# Altium PCB Arduino-SMPS-LED-Shield-Board.PcbDoc
Units mil, origin at the board's own origin, x right, y up, seen from the top; angles counter-clockwise.
Board outline 2700 x 2100 mil, 2 copper layers (Top Layer, Bottom Layer), stack 62.8 mil thick; 15 components, 31 nets, 62 pads, 20 vias.
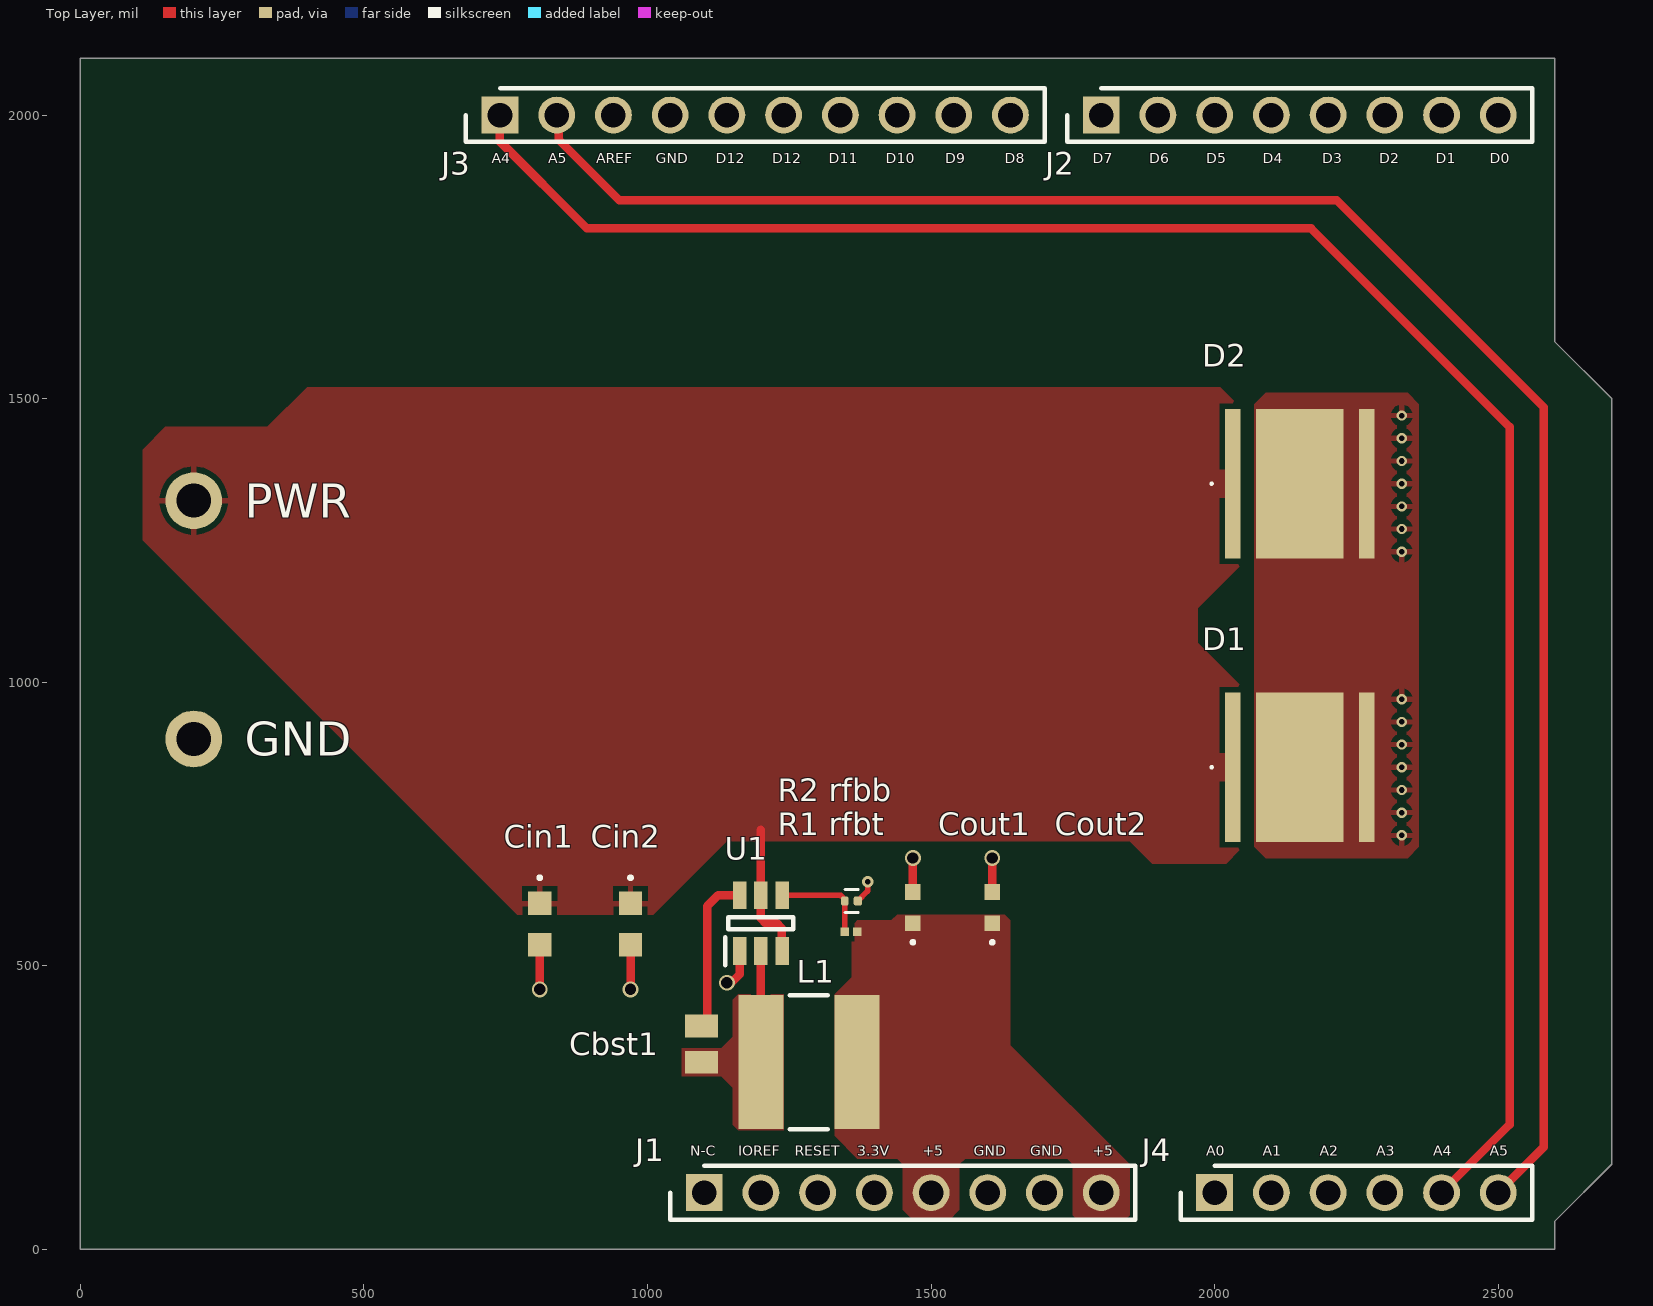
[diagram p0: Top Layer view]
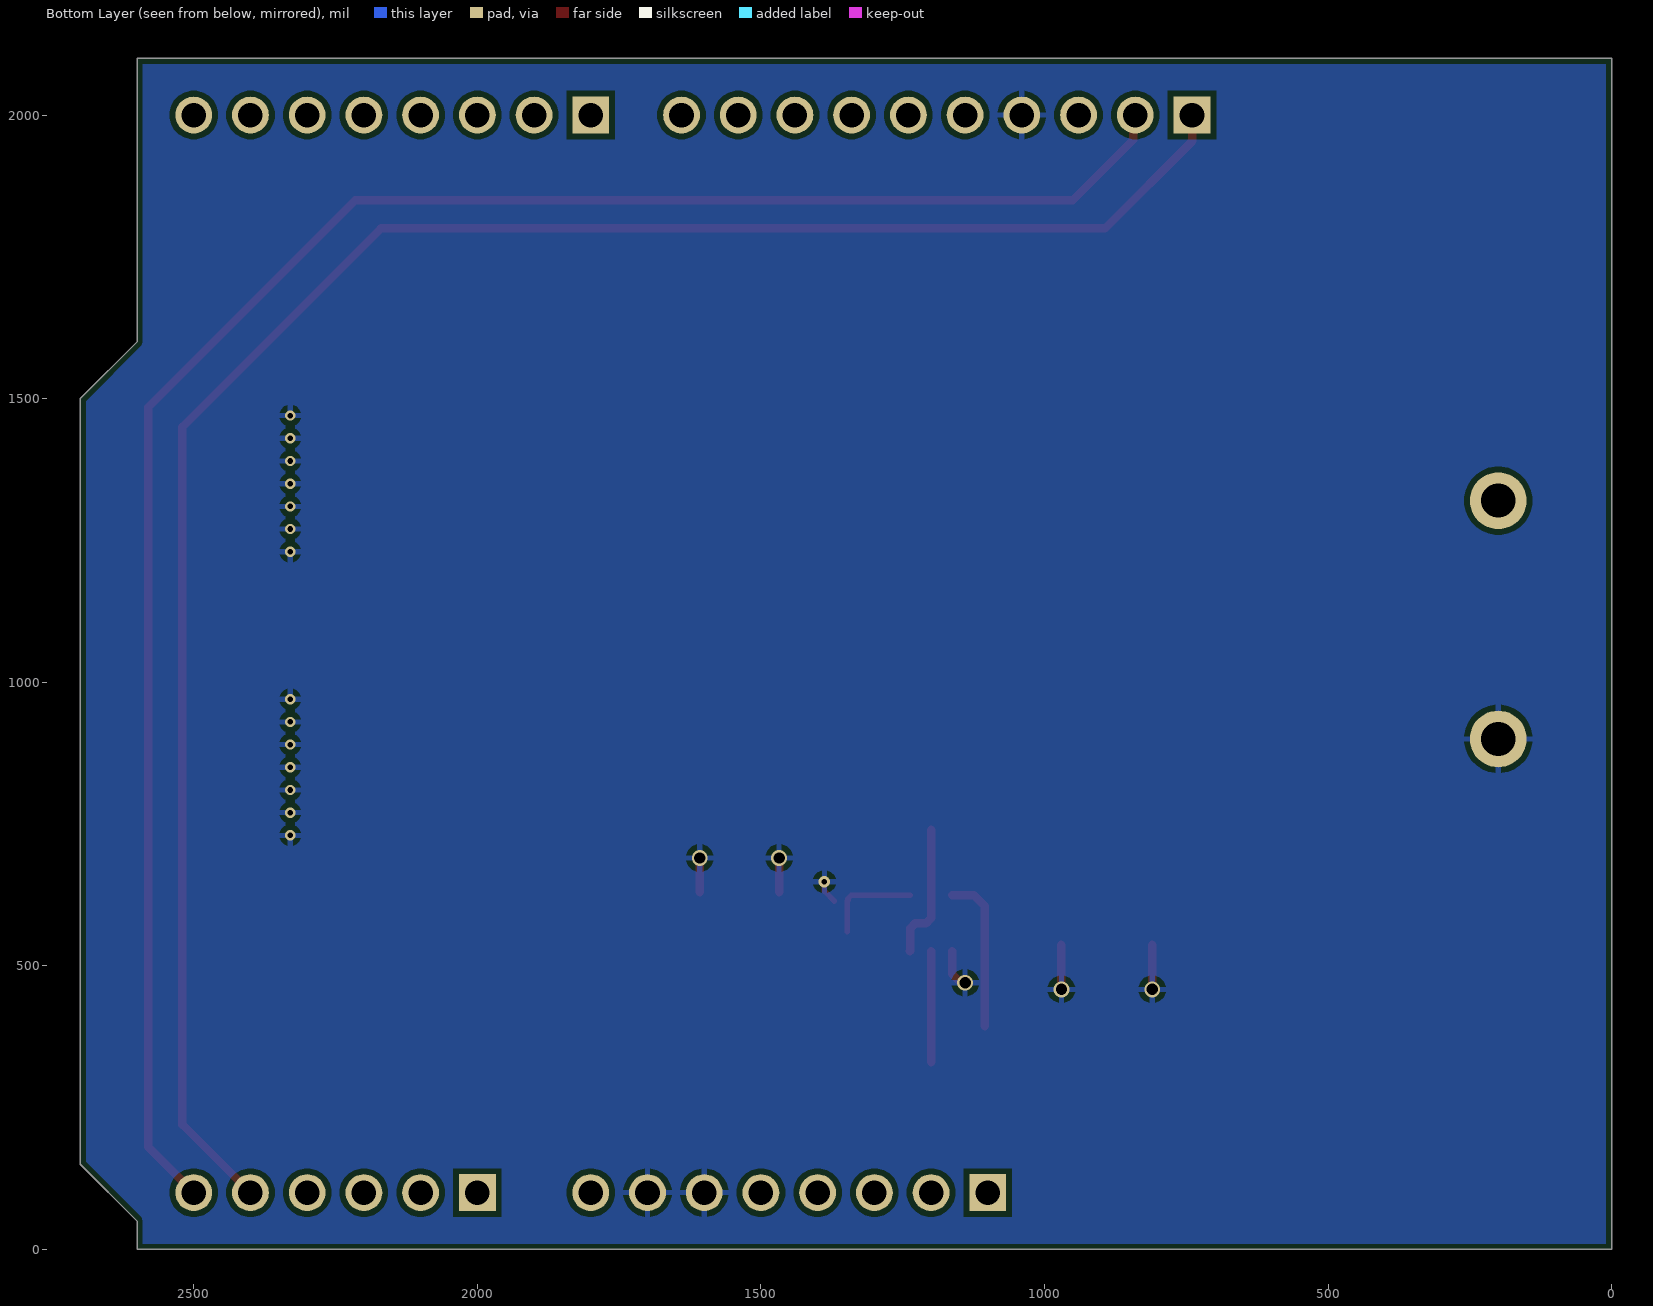
[diagram p1: Bottom Layer view, seen from below]
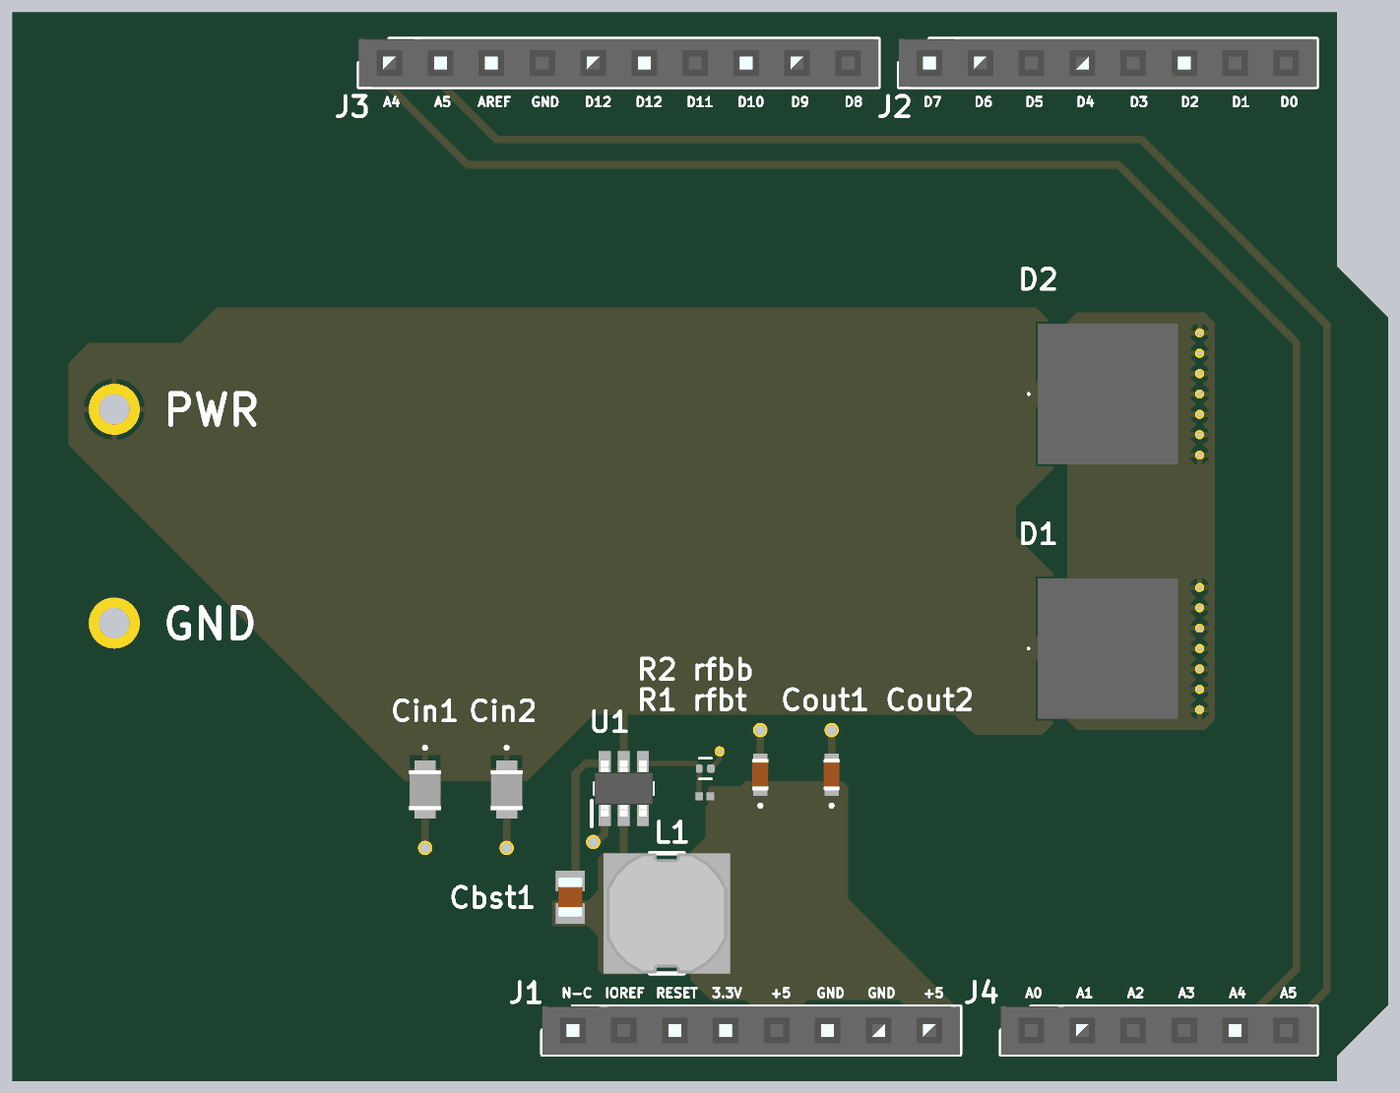
[diagram p2: 3D render of the assembled board from above, using the file's embedded part models]

## Layer stack, top to bottom
Top Solder: solder mask 0.4, Solder Resist, Dk 3.5
Top Layer: signal copper 1.4
Dielectric 1: dielectric 60, FR-4, Dk 4.8
Bottom Layer: signal copper 1.4
Bottom Solder: solder mask 0.4, Solder Resist, Dk 3.5

## Board outline
0,0 0,2100 2600,2100 2600,1600 2700,1500 2700,150 2600,50 2600,0

## Design rules (kind name [scope] priority, off if disabled: settings)
BoardOutlineClearance [All] p1: gap=10 ignorepadtopadclearanceinfootprint=FALSE
Clearance [All] p1: gap=10 ignorepadtopadclearanceinfootprint=TRUE except(8: Arc-SMDPad Track-SMDPad)
MinimumSolderMaskSliver [All] p1: minsoldermaskwidth=5
PolygonConnect [All] p1: connectstyle=Relief reliefconductorwidth=10 reliefentries=4 polygonreliefangle="90 Angle" airgapwidth=10
RoutingVias [All] p1: holewidth=10 width=18 viastyle="Through Hole" minholewidth=6 minwidth=14 maxholewidth=28 maxwidth=50
SilkToSolderMaskClearance [IsPad] p1: minsilkscreentomaskgap=5 clearancetoexposedcopper=TRUE
SolderMaskExpansion [All] p1: expansion=0 istentingtop=FALSE
Width [All] p1: maxlimit=30 minlimit=5 preferedwidth=15
28 further rules are at their usual default settings.

## Components (designator, comment, footprint, x,y, rotation, side; value= is the part's Value field where it differs from the comment)
Cbst1 "100nF" CAPC2012X94N 1095,361.89 r270 top
Cin1 "10 µF" C2012_Commercial 810,573.58 r270 top
Cin2 "10 µF" C2012_Commercial 970,573.58 r270 top
Cout1 "4.7 µH" C1608_Commercial 1467.87,602.44 r90 top
Cout2 "4.7 µH" C1608_Commercial 1607.87,602.44 r90 top
D1 "12V 1A LED" MKRAWT0200000D00J2051 2150,850 r0 top
D2 "12V 1A LED" MKRAWT0200000D00J2051 2150,1350 r0 top
J1 "SSQ-108-03-T-S" RHDR8W64P254_1X8_2083X241X851P 1100,100 r180 top
J2 "SSQ-108-03-T-S" RHDR8W64P254_1X8_2083X241X851P 1800,2000 r180 top
J3 "SSQ-110-03-T-S" RHDR10W64P254_1X10_2591X241X851P 740,2000 r180 top
J4 "SSQ-106-03-T-S" RHDR6W64P254_1X6_1575X241X851P 2000,100 r180 top
L1 "4.7 µH" SRN6045_1 1284.51,330 r0 top
"R1 rfbt" "RC0201FR-0756K2L" RESC0603X26N#1 1358.94,560 r0 top value="56.2 kΩ"
"R2 rfbb" "C0201FR-0710KL" RESC0603X26N#2 1359.88,614.33 r0 top value="10 kΩ"
U1 "TPS562200DDCR" SOT95P280X110-6N 1199.86,575.12 r90 top

## Footprints (in the part's own frame and the unit in brackets; to place one, negate y for a bottom-side part, rotate by r counter-clockwise, add the part's x,y. Pads: shape width x height; smd on the part's side, far side on the other; paste and mask are expansions set on the pad)
C1608_Commercial [mm]
  rect 0.7x0.7 smd: 1(-0.7,0) 2(0.7,0)
  silkscreen extent -1.6,-0.05 -1.5,0.05, body extent -0.8,-0.4 0.8,0.4, height 0.8
C2012_Commercial [mm]
  rect 1.05x1.05 smd: 1(-0.925,0) 2(0.925,0)
  silkscreen extent -2.12,-0.05 -2.03,0.05, body extent -0.96,-0.8 1.04,0.8, height 1.25
CAPC2012X94N [mm]
  rect 1.02x1.47 smd: 1(-0.81,0) 2(0.81,0)
  body extent -1,-0.63 1,0.63, height 0.94
MKRAWT0200000D00J2051 [mm]
  rect 0.7x6.7 smd: 1(-3,0) 2(3,0)
  rect 3.9x6.7 smd: 3(0,0)
  silkscreen extent -4,-0.05 -3.9,0.05, body extent -3.5,-3.5 3.5,3.5, height 4.31
RESC0603X26N#1 [mm]
  rect 0.38x0.4 smd: 1(-0.281,0) 2(0.281,0)
RESC0603X26N#2 [mm]
  rrect50% 0.33x0.4 smd: 1(-0.305,0)
  rrect50% 0.38x0.4 smd: 2(0.28,0)
  silkscreen extent -0.3,-0.52 0.3,0.52
RHDR6W64P254_1X6_1575X241X851P [mm]
  rect 1.65x1.65 hole 1.1: 1(0,0)
  round 1.65 hole 1.1: 2(-2.54,0) 3(-5.08,0) 4(-7.62,0) 5(-10.16,0) 6(-12.7,0)
  silkscreen extent -14.23,-1.2 1.53,1.2, body extent -14.23,-1.2 1.53,1.2, height 8.51
RHDR8W64P254_1X8_2083X241X851P [mm]
  rect 1.65x1.65 hole 1.1: 1(0,0)
  round 1.65 hole 1.1: 2(-2.54,0) 3(-5.08,0) 4(-7.62,0) 5(-10.16,0) 6(-12.7,0) 7(-15.24,0) 8(-17.78,0)
  silkscreen extent -19.31,-1.2 1.53,1.2, body extent -19.31,-1.2 1.53,1.2, height 8.51
RHDR10W64P254_1X10_2591X241X851P [mm]
  rect 1.65x1.65 hole 1.1: 1(0,0)
  round 1.65 hole 1.1: 2(-2.54,0) 3(-5.08,0) 4(-7.62,0) 5(-10.16,0) 6(-12.7,0) 7(-15.24,0) 8(-17.78,0) 9(-20.32,0) 10(-22.86,0)
  silkscreen extent -24.39,-1.2 1.53,1.2, body extent -24.39,-1.2 1.53,1.2, height 8.51
SOT95P280X110-6N [mm]
  rect 1.25x0.6 smd: 1(-1.25,0.95) 2(-1.25,0) 3(-1.25,-0.95) 4(1.25,-0.95) 5(1.25,0) 6(1.25,0.95)
  silkscreen extent -1.88,-1.45 0.28,1.6, body extent -1.4,-1.45 1.4,1.45, height 0.97
SRN6045_1 [mm]
  rect 2.01x6 smd: 1(-2.15,0) 2(2.15,0)
  silkscreen extent -0.85,-3 0.85,3, body extent -3,-3 3,3, height 4.5

## Part data
Cbst1: library part 08053C104KAT2A, "Capacitor", Manufacturer_Name=AVX, Mouser Part Number=581-08053C104K, Arrow Part Number=08053C104KAT2A, Arrow Price/Stock=https://www.arrow.com/en/products/08053c104kat2a/avx, Datasheet Link=http://datasheets.avx.com/X7RDielectric.pdf, Height=0.94mm, Manufacturer_Part_Number=08053C104KAT2A, Mouser Price/Stock=https://www.mouser.co.uk/ProductDetail/AVX/08053C104KAT2A?qs=EihRZLdKnF2GcTBzDkE%2FiQ%3D%3D
Cin1 Cin2: library part C2012X5R1V106K085AC, "Capacitor", Manufacturer_Name=TDK, Mouser Part Number=810-C2012X5R1V106K0C, Arrow Part Number=C2012X5R1V106K085AC, Arrow Price/Stock=https://www.arrow.com/en/products/c2012x5r1v106k085ac/tdk?region=nac, Datasheet Link=https://product.tdk.com/system/files/dam/doc/product/capacitor/ceramic/mlcc/catalog/mlcc_commercial_general_en.pdf, Height=0.75mm, Manufacturer_Part_Number=C2012X5R1V106K085AC, Mouser Price/Stock=https://www.mouser.co.uk/ProductDetail/TDK/C2012X5R1V106K085AC?qs=6JAMGB%252BEdky%252BlYMcTLhFyA%3D%3D
Cout1 Cout2: library part C1608X5R1A226M080AC, "Capacitor", Manufacturer_Name=TDK, Mouser Part Number=810-C1608X5R1A226M, Arrow Part Number=C1608X5R1A226M080AC, Arrow Price/Stock=https://www.arrow.com/en/products/c1608x5r1a226m080ac/tdk?region=nac, Datasheet Link=https://product.tdk.com/system/files/dam/doc/product/capacitor/ceramic/mlcc/catalog/mlcc_commercial_general_en.pdf, Height=0.9mm, Manufacturer_Part_Number=C1608X5R1A226M080AC, Mouser Price/Stock=https://www.mouser.co.uk/ProductDetail/TDK/C1608X5R1A226M080AC?qs=dfay7wIA1uED3Fb1o4f9Dg%3D%3D
D1: library part MKRAWT-02-0000-0D00J2051, "LED", Manufacturer_Name=Wolfspeed, Mouser Part Number=941-MKRAWT20D00J2051, Arrow Part Number=MKRAWT-02-0000-0D00J2051, Arrow Price/Stock=https://www.arrow.com/en/products/mkrawt-02-0000-0d00j2051/cree-led?region=nac, Datasheet Link=https://componentsearchengine.com/Datasheets/2/MKRAWT-02-0000-0D00J2051.pdf, Height=4.21mm, Manufacturer_Part_Number=MKRAWT-02-0000-0D00J2051, Mouser Price/Stock=https://www.mouser.co.uk/ProductDetail/Cree-LED/MKRAWT-02-0000-0D00J2051?qs=sVgt%2FnWVh7Z5XLS8l5jBtA%3D%3D
D2: library part CMP-011-000000-1, "LED Uni-Color White 6200K 65 2-Pin SMD EP T/R", Arrow Part Number=MKRAWT-02-0000-0D00J2051, Manufacturer_Name=Wolfspeed, Mouser Part Number=941-MKRAWT20D00J2051, Arrow Price/Stock=https://www.arrow.com/en/products/mkrawt-02-0000-0d00j2051/cree-led?region=nac, Datasheet Link=https://componentsearchengine.com/Datasheets/2/MKRAWT-02-0000-0D00J2051.pdf, Design Item ID=MKRAWT-02-0000-0D00J2051, Height=4.21mm, Manufacturer_Part_Number=MKRAWT-02-0000-0D00J2051, Mouser Price/Stock=https://www.mouser.co.uk/ProductDetail/Cree-LED/MKRAWT-02-0000-0D00J2051?qs=sVgt%2FnWVh7Z5XLS8l5jBtA%3D%3D, Source=SamacSys.SchLib
J1 J2: "Connector", Manufacturer_Name=SAMTEC, Mouser Part Number=200-SSQ10803TS, Arrow Part Number=SSQ-108-03-T-S, Arrow Price/Stock=https://www.arrow.com/en/products/ssq-108-03-t-s/samtec?region=nac, Datasheet Link=http://suddendocs.samtec.com/prints/ssq-1xx-xx-xxx-x-xx-xxx-xx-x-mkt.pdf, Height=8.51mm, Manufacturer_Part_Number=SSQ-108-03-T-S, Mouser Price/Stock=https://www.mouser.co.uk/ProductDetail/Samtec/SSQ-108-03-T-S?qs=rU5fayqh%252BE3sJVWDTx5zyQ%3D%3D
J3: "Connector", Manufacturer_Name=SAMTEC, Mouser Part Number=200-SSQ11003TS, Arrow Part Number=SSQ-110-03-T-S, Arrow Price/Stock=https://www.arrow.com/en/products/ssq-110-03-t-s/samtec?region=nac, Datasheet Link=http://suddendocs.samtec.com/prints/ssq-1xx-xx-xxx-x-xx-xxx-xx-x-mkt.pdf, Height=8.51mm, Manufacturer_Part_Number=SSQ-110-03-T-S, Mouser Price/Stock=https://www.mouser.co.uk/ProductDetail/Samtec/SSQ-110-03-T-S?qs=rU5fayqh%252BE0uAJE8UTgxfA%3D%3D
J4: "Connector", Manufacturer_Name=SAMTEC, Mouser Part Number=200-SSQ10603TS, Arrow Part Number=SSQ-106-03-T-S, Arrow Price/Stock=https://www.arrow.com/en/products/ssq-106-03-t-s/samtec?region=nac, Datasheet Link=http://suddendocs.samtec.com/prints/ssq-1xx-xx-xxx-x-xx-xxx-xx-x-mkt.pdf, Height=8.51mm, Manufacturer_Part_Number=SSQ-106-03-T-S, Mouser Price/Stock=https://www.mouser.co.uk/ProductDetail/Samtec/SSQ-106-03-T-S?qs=rU5fayqh%252BE1MgKYVKa8USw%3D%3D
L1: library part SRN6045-4R7Y, "Inductor", Manufacturer_Name=Bourns, Mouser Part Number=652-SRN6045-4R7Y, Arrow Part Number=SRN6045-4R7Y, Arrow Price/Stock=https://www.arrow.com/en/products/srn6045-4r7y/bourns?region=nac, Datasheet Link=https://www.bourns.com/data/global/pdfs/SRN6045.pdf, Manufacturer_Part_Number=SRN6045-4R7Y, Mouser Price/Stock=https://www.mouser.co.uk/ProductDetail/Bourns/SRN6045-4R7Y?qs=opBjA1TV902tB4tumIiZhg%3D%3D
"R1 rfbt": library part CMP-017-000000-2, "RES SMD 56.2K OHM 1% 1/20W 0201", Package=None, Availability=Unavailable, Component Type=Standard, Design Item ID=RC0201FR-0756K2L, MP=RC0201FR-0756K2L, Pin Count=2, Price=None, Source=RC0201FR-0756K2L.SchLib
"R2 rfbb": library part CMP-015-000000-1, "10 kOhms Â±1% 0.05W, 1/20W Chip Resistor 0201 (0603 Metric) Moisture Resistant Thick Film", Package="0201 Yageo", Availability="In Stock", Check_prices=https://www.snapeda.com/parts/RC0201FR-0710KL/Yageo/view-part/?ref=eda, Component Type=Standard, Design Item ID=RC0201FR-0710KL, MF=Yageo, MP=RC0201FR-0710KL, Pin Count=2, Price=None, Purchase-URL=https://pricing.snapeda.com/search/part/RC0201FR-0710KL/?ref=eda, SnapEDA_Link=https://www.snapeda.com/parts/RC0201FR-0710KL/Yageo/view-part/?ref=snap, Source=RC0201FR-0710KL.SchLib
U1: library part CMP-013-000000-2, "17 V Input", Manufacturer_Name="Texas Instruments", Mouser Part Number=595-TPS562200DDCR, Arrow Part Number=TPS562200DDCR, Arrow Price/Stock=https://www.arrow.com/en/products/tps562200ddcr/texas-instruments?region=nac, Datasheet Link=http://www.ti.com/lit/gpn/tps562200, Design Item ID=TPS562200DDCR, Height=1.1mm, Manufacturer_Part_Number=TPS562200DDCR, Mouser Price/Stock=https://www.mouser.co.uk/ProductDetail/Texas-Instruments/TPS562200DDCR?qs=7wMBv%2Ftbz9Jdis0htpD4wA%3D%3D, Source=SamacSys.SchLib

## Free pads (board coordinates)
  round 100 hole 60: 1(200,900) 1(200,1320)

## Via types
v1: diameter 18, hole 10, Top Layer to Bottom Layer, 14 vias
v2: diameter 28, hole 20, Top Layer to Bottom Layer, 5 vias
v3: diameter 20, hole 10, Top Layer to Bottom Layer, 1 vias

## Nets (pads, with @x,y where several pads share a name; then routed paths per layer and width w, separated by ;. In a path a pad name is that pad's centre, name@x,y a point inside that pad or via, vN(x,y) a via of type N, cw(c..) or ccw(c..) an arc to the next point about the centre after c; other vN are vias at no path point)
3.3V: J1.4
+5: "R1 rfbt.2" Cout1.1 Cout2.1 J1.5 J1.8 L1.2
+12: Cin1.1 Cin2.1 D1.1 D2.1 pad.1@200,1320 U1.3 U1.5 | length 240.8
  Top Layer w15: 1200,740 1199.86,739.86 U1.5 1199.86,583.79 1208.65,575 1227.77,575 1236.56,566.21 1236.56,526.61 U1.3
A0: J4.1
A1: J4.2
A2: J4.3
A3: J4.4
A4: J3.1 J4.5 | length 3435.3
  Top Layer w15: J3.1 739.53,1999.53 739.53,1953.81 893.33,1800 2170,1800 2520,1450 2520,220 J4.5
A5: J3.2 J4.6 | length 3394.9
  Top Layer w15: J3.2 843.88,1996.12 843.88,1956.12 950,1850 2215,1850 2580,1485 2580,180 J4.6
AREF: J3.3
D0: J2.8
D1: J2.7
D2: J2.6
D3: J2.5
D4: J2.4
D5: J2.3
D6: J2.2
D7: J2.1
D8: J3.10
D9: J3.9
D10: J3.8
D11: J3.7
D12: J3.6
D13: J3.5
GND: "R2 rfbb.2" Cin1.2 Cin2.2 Cout1.2 Cout2.2 D1.2 D1.3 D2.2 D2.3 J1.6 J1.7 J3.4 pad.1@200,900 U1.1 | length 388.1
  Top Layer w10: Cin1.2 Cin1.2@810.14,537.03 ; Cin2.2 Cin2.2@970.14,537.03 ; 1370.91,614.33 1370.91,614.72 1388.09,631.91 v3(1388.09,648.09)
  Top Layer w15: v2(810.14,458.46) Cin1.2@810.14,537.03 ; v2(970.14,458.46) Cin2.2@970.14,537.03 ; v2(1140,470) 1142.49,472.49 1150.16,472.49 1162.46,484.79 U1.1 ; Cout1.2 v2(1467.87,690) ; Cout2.2 v2(1607.87,690)
  other v1: 2330,730 2330,770 2330,810 2330,850 2330,890 2330,930 2330,970 2330,1230 2330,1270 2330,1310 2330,1350 2330,1390 2330,1430 2330,1470
IOREF: J1.2
N-C: J1.1
NetCbst1_1: Cbst1.1 U1.6 | length 276.7
  Top Layer w15: Cbst1.1@1105,393.78 1105,605 1124.33,624.33 U1.6
"NetR1 rfbt_1": "R1 rfbt.1" "R2 rfbb.1" U1.4 | length 170.6
  Top Layer w10: U1.4 1340.52,624.33 1346.38,618.47 1346.38,615.83 1347.87,614.33 1347.87,560
RESET: J1.3
"SW OUT": Cbst1.2 L1.1 U1.2 | length 195.9
  Top Layer w15: L1.1 U1.2

## Polygon pours and split planes (outlines as drawn)
"SW OUT" on Top Layer "SW_OUT_L01_P014" (solid, pour order 14): 1160,450 1150,440 1150,375 1130,355 1060,355 1060,305 1130,305 1150,285 1150,220 1160,210 1240,210 1240,450
+5 on Top Layer "+5_L01_P013" (solid, pour order 13): 1360,570 1360,480 1330,450 1330,200 1370,160 1440,160 1450,150 1450,70 1470,50 1530,50 1550,70 1550,150 1560,160 1740,160 1750,150 1750,60 1760,50 1840,50 1850,60 1850,150 1640,360 1640,580 1630,590 1440,590 1430,580 1370,580
+12 on Top Layer "+12_L01_P011" (solid, pour order 11): 110,1250 110,1410 150,1450 330,1450 400,1520 2010,1520 2050,1480 2050,1210 1970,1130 1970,1070 2050,990 2050,710 2020,680 1890,680 1850,720 1140,720 1130,710 1010,590 770,590 1010,590 770,590
GND on Top Layer "GND_L01_P001" (solid, pour order 1): 2070,1490 2090,1510 2340,1510 2360,1490 2360,710 2340,690 2090,690 2070,710
GND on Bottom Layer "GND_L02_P000" (solid, pour order 0): 0,0 2600,0 2600,50 2700,150 2700,1500 2600,1600 2600,2100 0,2100

## Silkscreen, mask and mechanical layers (free items; w line width, h text height)
Top Overlay:
  text "A4" at 725,1915 h18
  text "A5" at 825,1915 h18
  text "AREF" at 910,1915 h18
  text "GND" at 1015,1915 h18
  text "D12" at 1120,1915 h18
  text "D12" at 1220,1915 h18
  text "D11" at 1320,1915 h18
  text "D10" at 1420,1915 h18
  text "D9" at 1525,1915 h18
  text "D8" at 1630,1915 h18
  text "D7" at 1785,1915 h18
  text "D6" at 1885,1915 h18
  text "D5" at 1985,1915 h18
  text "D4" at 2085,1915 h18
  text "D3" at 2190,1915 h18
  text "D2" at 2290,1915 h18
  text "D1" at 2390,1915 h18
  text "D0" at 2485,1915 h18
  text "PWR" at 290,1290 h60
  text "GND" at 290,870 h60
  text "N-C" at 1075,165 h18
  text "IOREF" at 1160,165 h18
  text "RESET" at 1260,165 h18
  text "3.3V" at 1370,165 h18
  text "+5" at 1485,165 h18
  text "GND" at 1575,165 h18
  text "GND" at 1675,165 h18
  text "+5" at 1785,165 h18
  text "A0" at 1985,165 h18
  text "A1" at 2085,165 h18
  text "A2" at 2185,165 h18
  text "A3" at 2285,165 h18
  text "A4" at 2385,165 h18
  text "A5" at 2485,165 h18
Mechanical 1:
  the board outline again, w10